# Altium PCB AD_Auto_Clicker.pcbdoc
Units mm, origin at the board's own origin, x right, y up, seen from the top; angles counter-clockwise.
Board outline 65.66 x 35.31 mm, 2 copper layers (Top Layer, Bottom Layer); 6 components, 8 nets, 27 pads, 0 vias.
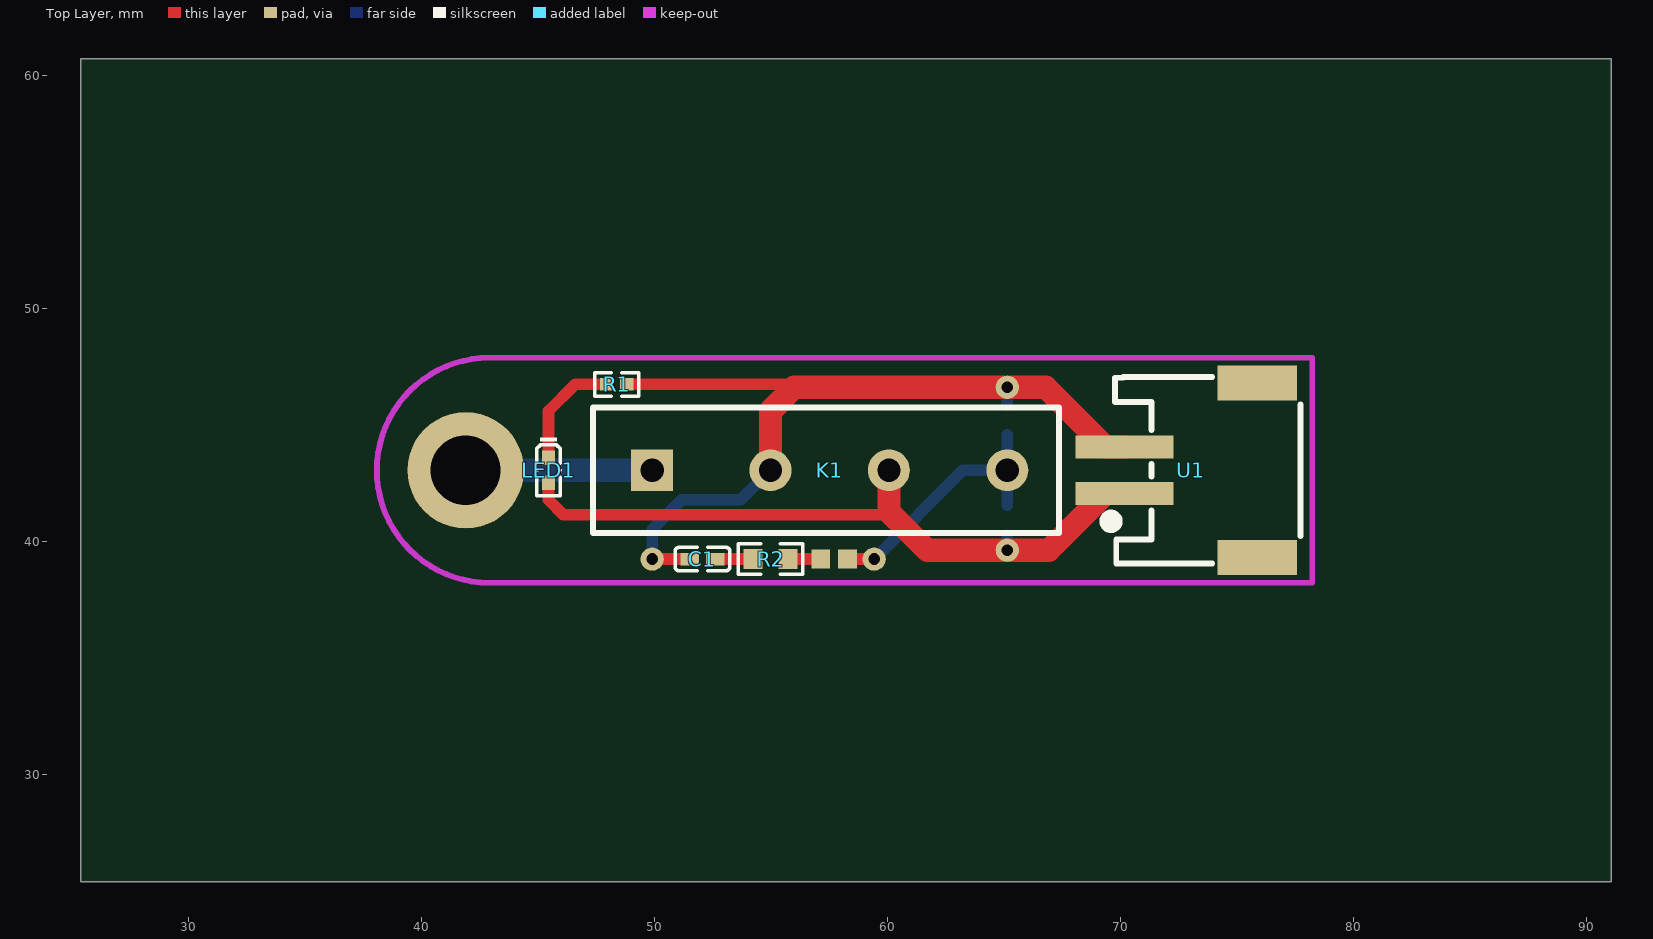
[diagram p0: Top Layer view]
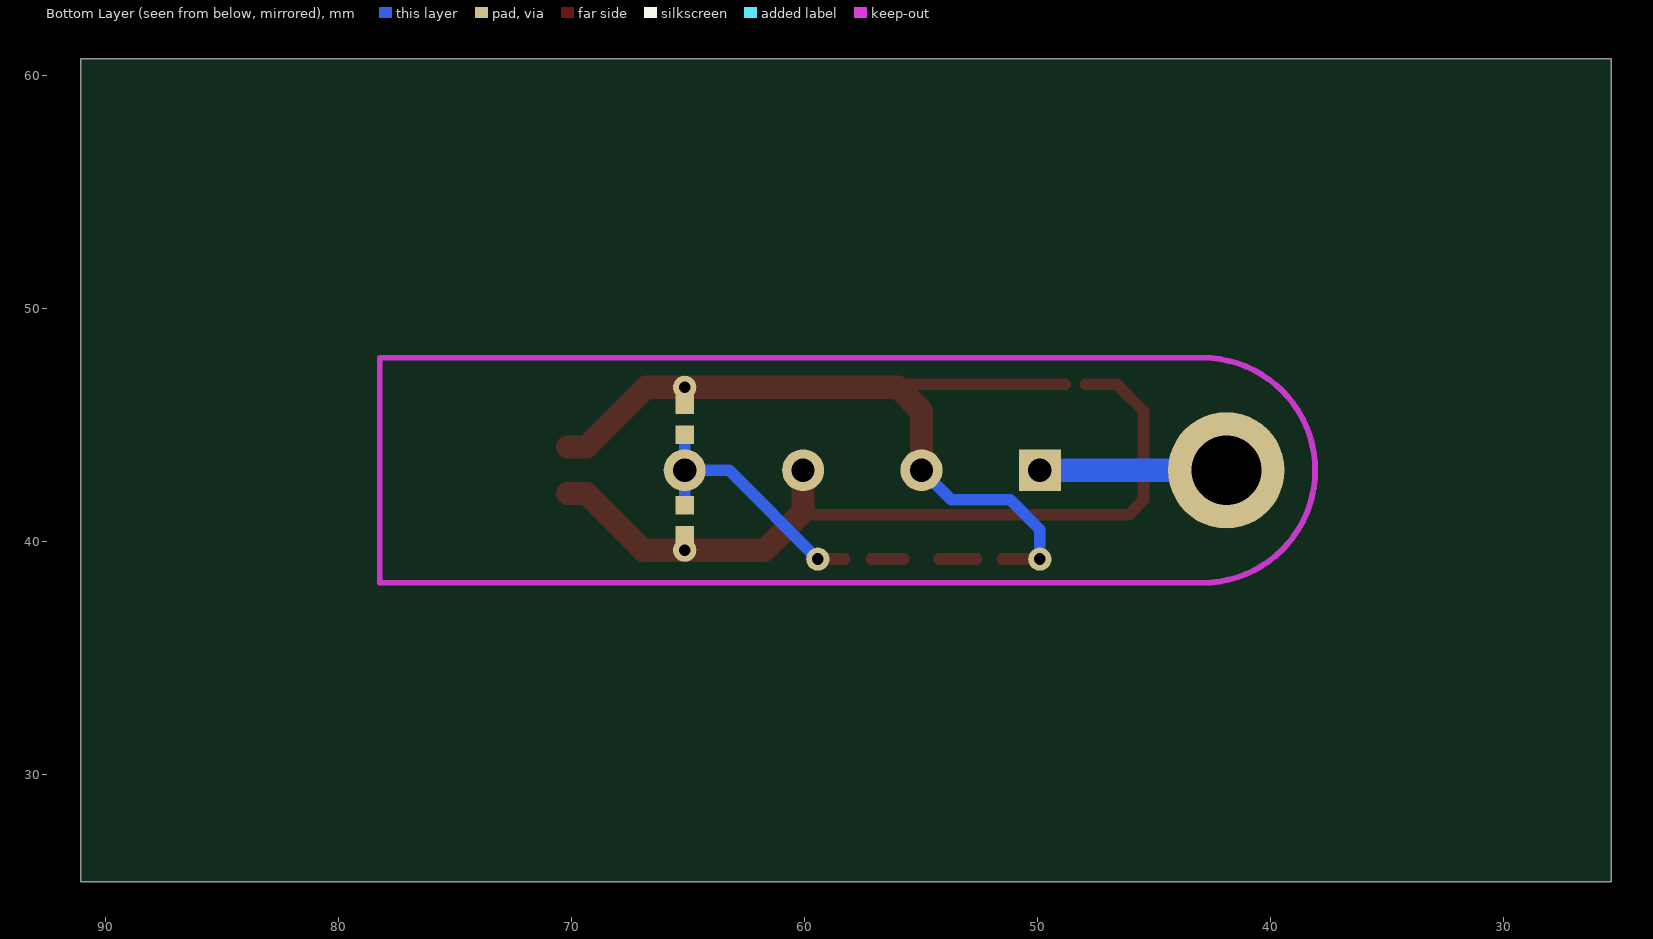
[diagram p1: Bottom Layer view, seen from below]

## Layer stack, top to bottom
Top Layer: signal copper (thickness not stored)
Dielectric: dielectric 0.32, FR-4, Dk 4.8
Bottom Layer: signal copper (thickness not stored)

## Board outline
91.059,25.4 25.4,25.4 25.4,60.706 91.059,60.706

## Components (designator, comment, footprint, x,y, rotation, side; value= is the part's Value field where it differs from the comment)
C1 "C0402" C0402 52.07,39.243 r0 top
K1 "RELAY-TH_SIP-1A05" RELAY-TH_SIP-1A05 57.531,43.053 r0 top
LED1 "LED0402-RD" LED0402-RD 45.466,43.053 r270 top
R1 "R0402" R0402 48.387,46.736 r0 top
R2 "R0603" R0603 54.991,39.243 r0 top
U1 "CONN-SMD_2P-P2.00_HDGC_HDGC2001WR-S-2P" CONN-SMD_2P-P2.00_HDGC_HDGC2001WR-S-2P 73.025,43.053 r90 top

## Footprints (in the part's own frame and the unit in brackets; to place one, negate y for a bottom-side part, rotate by r counter-clockwise, add the part's x,y. Pads: shape width x height; smd on the part's side, far side on the other; paste and mask are expansions set on the pad)
C0402 [mm]
  rect 0.79x0.54 smd: 1(-0.545,0) 2(0.545,0)
  silkscreen extent -1.17,-0.5 1.17,0.5
CONN-SMD_2P-P2.00_HDGC_HDGC2001WR-S-2P [mm]
  rect 1x4.2 smd: 1(-1,2.85) 2(1,2.85)
  rect 1.5x3.4 smd: 3(3.75,-2.85) 4(-3.75,-2.85)
  silkscreen extent -4,-4.7 4,3.68
LED0402-RD [mm]
  rect 0.636x0.54 smd: 1(-0.538,0) 2(0.538,0)
  silkscreen extent -1.39,-0.54 1.09,0.54
R0402 [mm]
  rect 0.566x0.54 smd: 1(-0.433,0) 2(0.433,0)
  silkscreen extent -0.94,-0.5 0.94,0.5
R0603 [mm]
  rect 0.806x0.864 smd: 1(-0.753,0) 2(0.753,0)
  silkscreen extent -1.39,-0.66 1.39,0.66
RELAY-TH_SIP-1A05 [mm]
  rect 1.8x1.8 hole 1: 1(-7.62,0)
  round 1.8 hole 1: 3(-2.54,0) 5(2.54,0) 7(7.62,0)
  silkscreen extent -10.16,-2.7 9.84,2.7

## Free pads (board coordinates)
  round 5 hole 3: ""(41.91,43.053)
  round 1 hole 0.5: ""(49.911,39.243) ""(59.436,39.243) ""(65.151,39.624) ""(65.151,46.609)
  rect 0.8x0.8 smd: ""(57.15,39.243) ""(58.293,39.243)
  rect 0.8x0.8 smd far side: ""(65.151,40.259) ""(65.151,44.577) ""(65.151,41.559) ""(65.151,45.877)

## Nets (pads, with @x,y where several pads share a name; then routed paths per layer and width w, separated by ;. In a path a pad name is that pad's centre, name@x,y a point inside that pad or via, vN(x,y) a via of type N, cw(c..) or ccw(c..) an arc to the next point about the centre after c; other vN are vias at no path point)
DEBUG: pad.@57.15,39.243 R2.2 | length 1.4
  Top Layer w0.5: R2.2 pad.@57.15,39.243
GND: C1.1 K1.3 pad.@49.911,39.243 pad.@65.151,45.877 pad.@65.151,46.609 R1.2 U1.2 | length 36.8
  Top Layer w0.5: R1.2 56.7,46.736 ; pad.@49.911,39.243 C1.1
  Top Layer w1: K1.3 54.991,45.593 56.007,46.609 66.802,46.609 69.357,44.054 U1.2
  Bottom Layer w0.5: pad.@49.911,39.243 49.911,40.513 51.181,41.783 53.721,41.783 K1.3 ; pad.@65.151,45.877 pad.@65.151,46.609
S$1157: 
S$1882: K1.1 pad.@41.91,43.053 | length 8
  Bottom Layer w1: pad.@41.846,43.053 K1.1@49.847,43.053
S$200141: LED1.1 R1.1 | length 5
  Top Layer w0.5: LED1.1 45.466,45.593 46.609,46.736 R1.1
S$205856: K1.7 pad.@58.293,39.243 pad.@59.436,39.243 pad.@65.151,41.559 pad.@65.151,44.577 | length 11.5
  Top Layer w0.5: pad.@58.293,39.243 pad.@59.436,39.243
  Bottom Layer w0.5: pad.@59.436,39.243 63.246,43.053 K1.7 ; pad.@65.151,41.559 K1.7 ; pad.@65.151,44.577 K1.7
S$206389: C1.2 R2.1 | length 1.6
  Top Layer w0.5: C1.2 R2.1
VCC: K1.5 LED1.2 pad.@65.151,39.624 pad.@65.151,40.259 U1.1 | length 29.8
  Top Layer w0.5: LED1.2 45.466,41.783 46.101,41.148 60.071,41.148
  Top Layer w1: K1.5 60.071,41.275 61.722,39.624 66.929,39.624 69.357,42.052 U1.1
  Bottom Layer w0.5: pad.@65.151,39.624 pad.@65.151,40.259
pads on no net: U1.3 U1.4

## Keep-outs
Keep-Out Layer:
  lines w0.254 net S$1157: 42.926,38.227 cw(c42.926,43.053) 42.926,47.879